# Altium PCB PCB1.PcbDoc
Units mm, origin at the board's own origin, x right, y up, seen from the top; angles counter-clockwise.
Board outline 123.82 x 94.36 mm, 2 copper layers (Top Layer, Bottom Layer); 60 components, 37 nets, 199 pads, 35 vias.
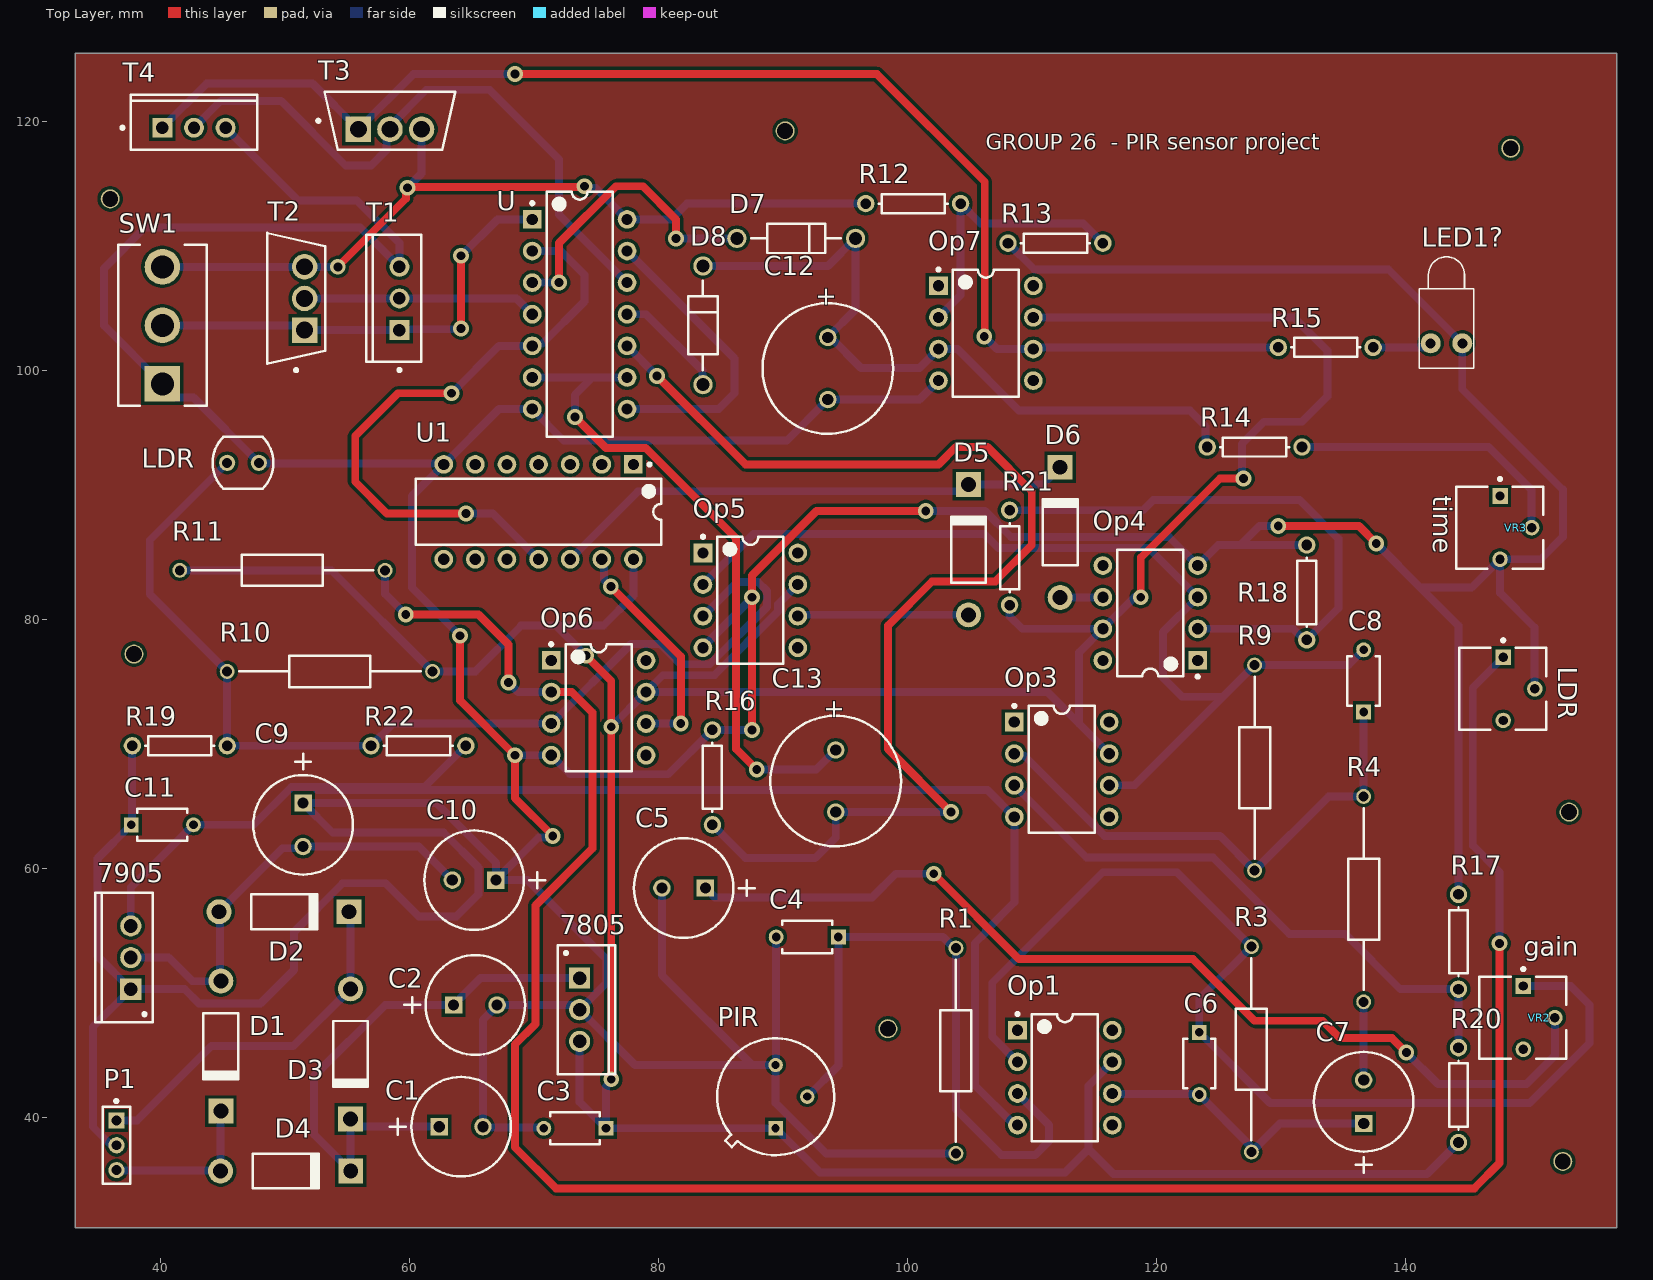
[diagram p0: Top Layer view]
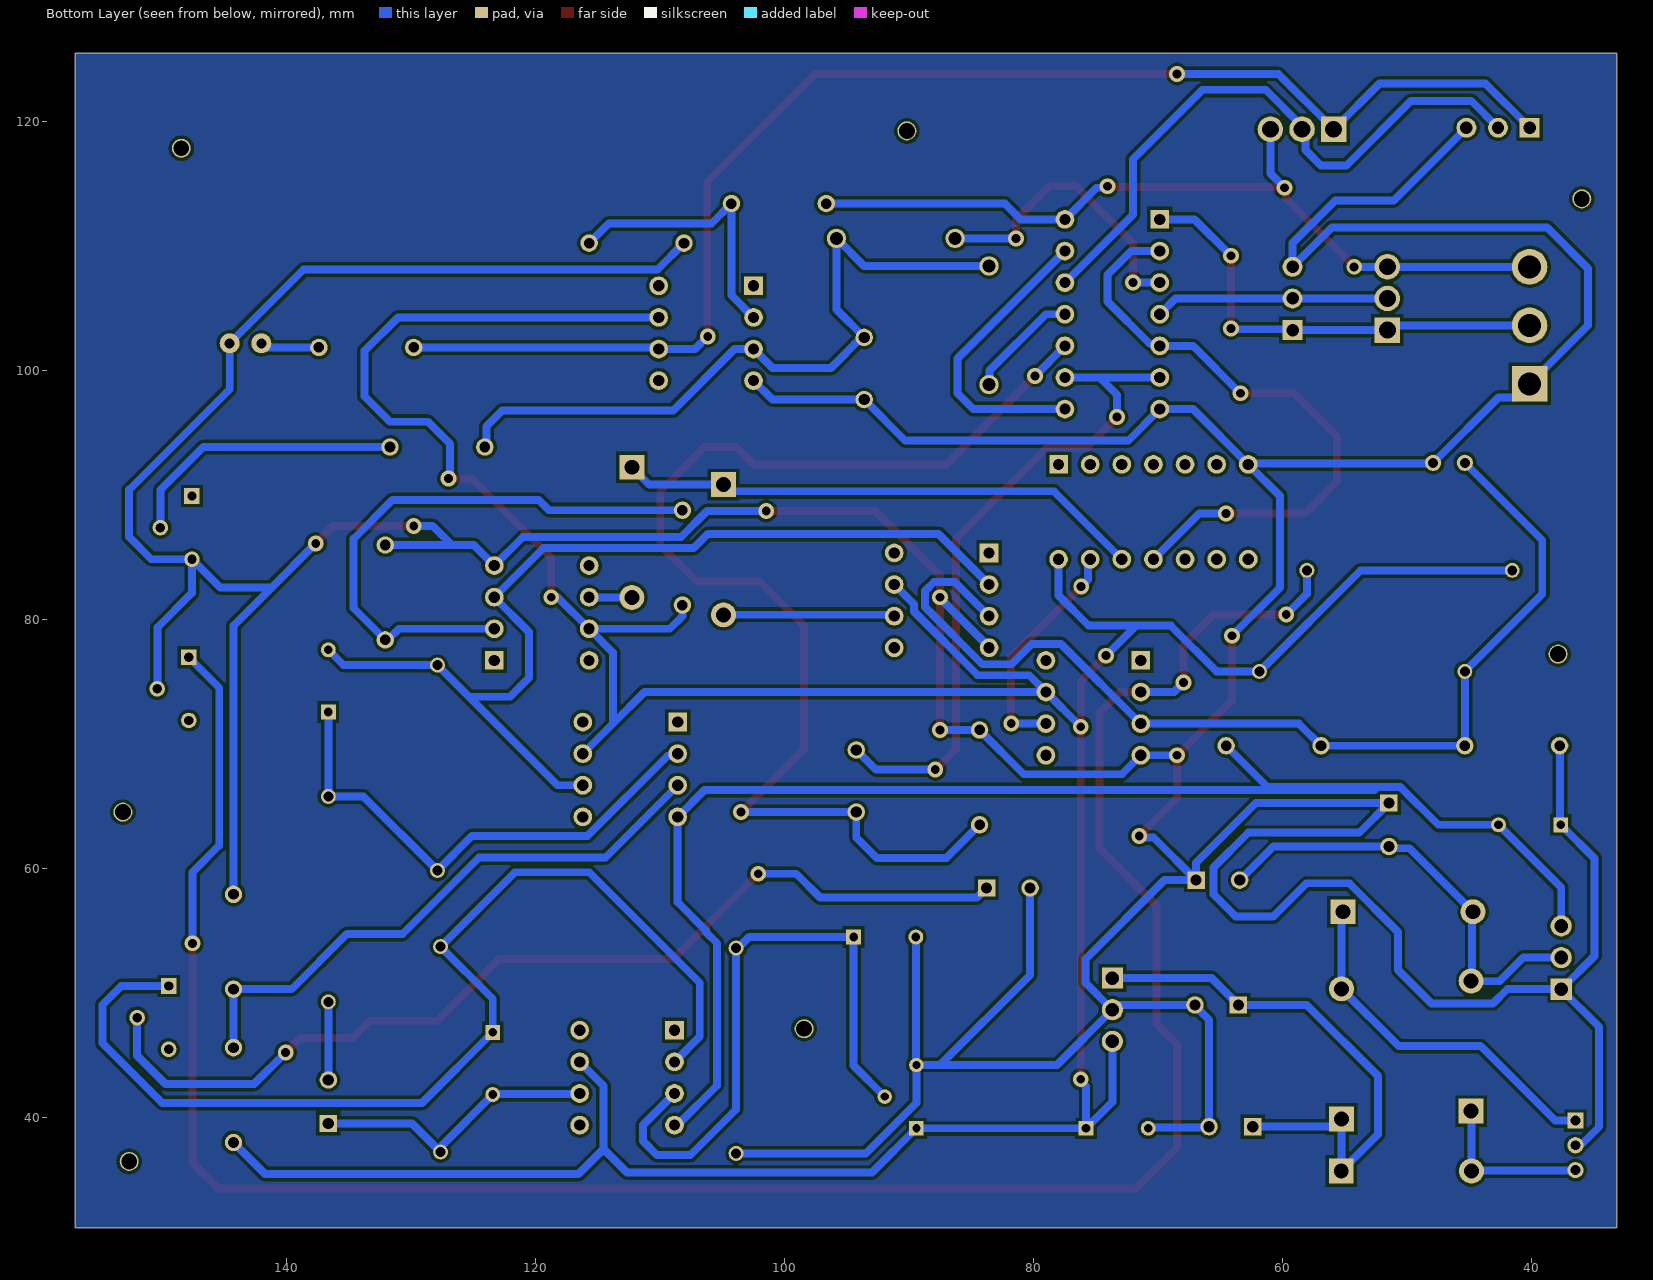
[diagram p1: Bottom Layer view, seen from below]

## Layer stack, top to bottom
Top Solder: solder mask 0.0102, Solder Resist, Dk 3.5
Top Layer: signal copper 0.0356
Dielectric 1: dielectric 0.32, FR-4, Dk 4.8
Bottom Layer: signal copper 0.0356
Bottom Solder: solder mask 0.0102, Solder Resist, Dk 3.5

## Board outline
33.147,31.115 156.972,31.115 156.972,125.476 33.147,125.476

## Design rules (kind name [scope] priority, off if disabled: settings)
Clearance [All] p1: gap=0.254 ignorepadtopadclearanceinfootprint=TRUE except(0: Arc-Hole Track-Hole SMDPad-Hole THPad-Hole Via-Hole Fill-Hole Poly-Hole Region-Hole Text-Hole)
PolygonConnect [All] p1: connectstyle=Relief reliefconductorwidth=0.254 reliefentries=4 polygonreliefangle="90 Angle" airgapwidth=0.254
RoutingVias [All] p1: holewidth=0.711 width=1.27 viastyle="Through Hole" minholewidth=0.711 minwidth=1.27 maxholewidth=0.711 maxwidth=1.27
SolderMaskExpansion [All] p1: expansion=0.102 istentingtop=FALSE
Width [All] p1: maxlimit=0.635 minlimit=0.254 preferedwidth=0.635 minimp=50.000000 maximp=50.000000 favimp=50.000000
30 further rules are at their usual default settings.

## Components (designator, comment, footprint, x,y, rotation, side; value= is the part's Value field where it differs from the comment)
7805 "L7805CV" TO220 73.66,48.641 r270 top
7905 "L7905CV" TO-220 37.592,52.832 r90 top
C1 "470uF 16V" CAPPR65-350-1150X800X1250 64.135,39.243 r0 top
C2 "330nF 16V" CAPPR65-350-1150X800X1250 65.278,49.022 r0 top
C3 "100nF" FP-K15H5-MFG 73.279,39.116 r180 top
C4 "100nF" FP-K15H5-MFG 91.948,54.483 r180 top
C5 "47uF 16V" CAPPR65-350-1150X800X1250 82.014,58.42 r180 top
C6 "10nF" FP-K15H5-MFG 123.444,44.323 r270 top
C7 "10uF 16V" CAPPR65-350-1150X800X1250 136.652,41.247 r90 top
C8 "10nF" FP-K15H5-MFG 136.652,75.057 r90 top
C9 "470uF 16V" CAPPR65-350-1150X800X1250 51.435,63.5 r270 top
C10 "330nF 16V" CAPPR65-350-1150X800X1250 65.179,59.055 r180 top
C11 "100nF" FP-K15H5-MFG 40.132,63.5 r0 top
C12 "ECA-1HHG471" PNSC-CAP-10x20-P2 93.599,100.163 r270 top
C13 "ECA-1HHG471" PNSC-CAP-10x20-P2 94.234,67.016 r270 top
D1 "Diode 1N4004" DO-41 44.831,45.72 r270 top
D2 "Diode 1N4004" DO-41 49.911,56.515 r0 top
D3 "Diode 1N4004" DO-41 55.245,45.085 r270 top
D4 "Diode 1N4004" DO-41 50.038,35.687 r0 top
D5 "Diode 1N4004" DO-41 104.902,85.598 r90 top
D6 "Diode 1N4004" DO-41 112.268,86.995 r90 top
D7 "1N4004" ONSC-AXIAL_LEAD-2-59-10_P 91.059,110.617 r180 top
D8 "1N4004" ONSC-AXIAL_LEAD-2-59-10_P 83.566,103.632 r270 top
LDR "3362P-1-103LF" BOUR-3362P 147.828,74.422 r270 top (schematic designator VR1)
LDR "VT90N1" EXCE-VT90N1 46.609,92.583 r180 top
LED1? "LED1" LED-1 143.307,102.186 r90 top
Op1 "LM741" P0008A 112.649,43.18 r0 top
Op3 "LM741" P0008A 112.395,67.945 r0 top
Op4 "LM741" P0008A 119.507,80.518 r180 top
Op5 "LM741" P0008A 87.376,81.534 r0 top
Op6 "LM741" P0008A 75.184,72.898 r0 top
Op7 "LM741" P0008A 106.299,102.997 r0 top
P1 "951103-8622-AR" FP-951103-8622-AR-MFG 36.449,37.751 r270 top
PIR "IRA-S210ST01" FP-IRA-S210ST01-MFG 89.408,41.656 r180 top
R1 "47kΩ" RESAD1650W60L650D250 103.886,53.594 r270 top
R3 "2MΩ" RESAD1650W60L650D250 127.635,53.711 r270 top
R4 "10kΩ" RESAD1650W60L650D250 136.652,49.276 r90 top
R9 "1MΩ" RESAD1650W60L650D250 127.889,59.827 r90 top
R10 "10kΩ" RESAD1650W60L650D250 45.339,75.819 r0 top
R11 "5kΩ" RESAD1650W60L650D250 58.029,83.947 r180 top
R12 "47kΩ" AXIAL-0.3 100.457,113.411 r0 top
R13 "47kΩ" AXIAL-0.3 111.887,110.236 r180 top
R14 "Res1" AXIAL-0.3 127.889,93.853 r180 top value=1K
R15 "Res1" AXIAL-0.3 133.604,101.854 r0 top value=1K
R16 "Res1" AXIAL-0.3 84.328,67.31 r90 top value=1K
R17 "47kΩ" AXIAL-0.3 144.272,54.102 r270 top
R18 "47kΩ" AXIAL-0.3 132.08,82.169 r270 top
R19 "47kΩ" AXIAL-0.3 41.529,69.85 r0 top
R20 "47kΩ" AXIAL-0.3 144.272,41.783 r270 top
R21 "47kΩ" AXIAL-0.3 108.204,84.963 r270 top
R22 "47kΩ" AXIAL-0.3 60.706,69.85 r0 top
SW1 "A101SYCB04" FP-A101SYCB04-MFG 40.132,103.632 r180 top
T1 "SPP21N50C3" INF-PG-TO220-3-1 59.182,105.791 r180 top
T2 "IRF9530PBF" FP-X15-0364-MFG 50.877,105.791 r180 top
T3 "IRF9530PBF" FP-X15-0364-MFG 58.42,120.065 r90 top
T4 "SPP21N50C3" INF-PG-TO220-3-1 42.672,119.507 r90 top
U "SN74AHCT08N" N0014A 73.66,104.521 r0 top
U1 "SN74AHCT08N" N0014A 70.358,88.646 r270 top
VR2 "3362P-1-103LF" BOUR-3362P 149.444,48.006 r270 top
VR3 "3362P-1-103LF" BOUR-3362P 147.574,87.376 r270 top

## Footprints (in the part's own frame and the unit in brackets; to place one, negate y for a bottom-side part, rotate by r counter-clockwise, add the part's x,y. Pads: shape width x height; smd on the part's side, far side on the other; paste and mask are expansions set on the pad)
AXIAL-0.3 [mm] "Axial Device, Thru-Hole; 2 Leads; 0.3 in Pin Spacing"
  round 1.4 hole 0.85: 1(-3.81,0) 2(3.81,0)
  silkscreen extent -2.77,-0.76 2.77,0.76
BOUR-3362P [mm] "THD, 3-Leads, Body 6.6x6.99mm, Pitch 2.54mm"
  rect 1.25x1.25 hole 0.75: 1(-2.54,0.035)
  round 1.25 hole 0.75: 2(0,2.575) 3(2.54,0.035)
  silkscreen extent -4.02,-3.49 3.3,3.5, body extent -3.3,-3.49 3.3,3.49, height 4.95
CAPPR65-350-1150X800X1250 [mm] "THD, 2-Leads, Dia 8mm, Body 11.5mm"
  rect 1.4x1.4 hole 0.9: 1(-1.75,0)
  round 1.4 hole 0.9: 2(1.75,0)
  silkscreen extent -5.72,-4 4,4, body extent -4,-4 4,4, height 12.5
DO-41 [mm] "Diode, Axial; Body 5.2 x 2.7 mm (LxDia. max), Lead Dia. 0.86 mm (max)"
  round 2 hole 1.2: 1(-5.23,0)
  rect 2x2 hole 1.2: 2(5.23,0)
  silkscreen extent -2.65,-1.4 2.75,1.4
EXCE-VT90N1 [mm] "THD, 2-Leads, Body Width 4.17mm (Max), Height 2.29mm"
  round 1.3 hole 0.8: 1(-1.27,0) 2(1.27,0)
  silkscreen extent -2.44,-2.08 2.44,2.08, body extent -2.44,-2.09 2.44,2.09, height 2.29
FP-951103-8622-AR-MFG [mm]
  rect 1.3x1.3 hole 0.8 paste-1000 mask+0: 1(-2,0)
  round 1.3 hole 0.8 paste-1000 mask+0: 2(0,0) 3(2,0)
  silkscreen extent -3.67,-1.1 3.1,1.1, body extent -3.2,-1.2 3.2,1.2, height 0.25
FP-A101SYCB04-MFG [mil]
  rect 112.37x112.37 hole 73 paste-39370.1 mask+0: 1(0,185)
  round 112.37 hole 73 paste-39370.1 mask+0: 2(0,0) 3(0,-185)
  silkscreen extent -140,-255 140,255, body extent -144,-259 144,259, height 10
FP-IRA-S210ST01-MFG [mm]
  rect 1.15x1.15 hole 0.65 paste-1000 mask+0: 1(0,2.54)
  round 1.15 hole 0.65 paste-1000 mask+0: 2(-2.54,0) 3(0,-2.54)
  silkscreen extent -4.7,-4.7 4.7,4.7, body extent -4.8,-4.8 4.8,4.8, height 0.25
FP-K15H5-MFG [mm]
  rect 1.2x1.2 hole 0.7 paste-1000 mask+0: 1(-2.5,0)
  round 1.2 hole 0.7 paste-1000 mask+0: 2(2.5,0)
  silkscreen extent -2,-1.3 2,1.3, body extent -3.2,-1.4 3.2,1.4, height 0.25
FP-X15-0364-MFG [mm]
  rect 2.05x2.05 hole 1.35 paste-1000 mask+0: 1(-0.685,2.54)
  round 2.05 hole 1.35 paste-1000 mask+0: 2(-0.685,0) 3(-0.685,-2.54)
  silkscreen extent -2.33,-5.26 2.33,5.88, body extent -2.42,-5.36 2.42,5.36, height 0.25
INF-PG-TO220-3-1 [mm] "FM, 3-Leads, Body 10x4.4mm, Pitch 2.54mm"
  rect 1.6x1.6 hole 1: 1(0,2.54)
  round 1.6 hole 1: 2(0,0) 3(0,-2.54)
  silkscreen extent -1.75,-5.1 2.65,5.87, body extent -1.75,-5.1 2.65,5.1, height 20.7
LED-1 [mm] "LED; 2 Leads"
  round 1.6 hole 0.8: 1(0,1.27) 2(0,-1.27)
  silkscreen extent -2,-2.2 6.95,2.2
N0014A [mm] "DIP, 14-Leads, Body 19.7x6.6mm, Pitch 2.54mm"
  rect 1.5x1.5 hole 0.9: 1(-3.81,7.62)
  round 1.5 hole 0.9: 2(-3.81,5.08) 3(-3.81,2.54) 4(-3.81,0) 5(-3.81,-2.54) 6(-3.81,-5.08) 7(-3.81,-7.62) 8(3.81,-7.62) 9(3.81,-5.08) 10(3.81,-2.54) 11(3.81,0) 12(3.81,2.54) 13(3.81,5.08) 14(3.81,7.62)
  silkscreen extent -3.93,-9.85 2.65,9.85, body extent -3.95,-9.85 3.95,9.85, height 5.08
ONSC-AXIAL_LEAD-2-59-10_P [mm] "AXIAL, 2-Leads, Diameter 2.35mm"
  round 1.55 hole 1.05: 1(-4.77,0) 2(4.77,0)
  silkscreen extent -3.6,-1.18 3.6,1.18
P0008A [mm] "DIP, 8-Leads, Body 10.15x6.6mm, Pitch 2.54mm"
  rect 1.5x1.5 hole 0.9: 1(-3.81,3.81)
  round 1.5 hole 0.9: 2(-3.81,1.27) 3(-3.81,-1.27) 4(-3.81,-3.81) 5(3.81,-3.81) 6(3.81,-1.27) 7(3.81,1.27) 8(3.81,3.81)
  silkscreen extent -3.93,-5.1 2.65,5.23, body extent -3.95,-5.07 3.95,5.07, height 5.08
PNSC-CAP-10x20-P2 [mm] "THD, 2-Leads, Dia 10.5mm, Body Length 22mm, Pin Spacing 5mm"
  round 1.4 hole 0.9: 1(-2.5,0) 2(2.5,0)
  silkscreen extent -5.25,-5.25 5.25,5.25, body extent -5.25,-5.25 5.25,5.25, height 22
RESAD1650W60L650D250 [mm]
  round 1.2 hole 0.8: 1(0,0) 2(16.5,0)
  silkscreen extent 0.95,-1.25 15.55,1.25, body extent -0.3,-1.25 16.8,1.25, height 2.49
TO220 [mm] "TO, Thru-Hole, Vertical, Heatsink Mounted; 3 In-Line Leads; Pitch 2.54 mm"
  rect 1.7x1.7 hole 1.1: 1(-2.54,0)
  round 1.7 hole 1.1: 2(0,0) 3(2.54,0)
  silkscreen extent -5.2,-1.75 5.2,2.85, body extent -5.25,-1.8 5.25,2.9, height 19.7
TO-220 [mm] "TO, Thru-Hole, Vertical, Heatsink Mounted; 3 In-Line Leads; Pitch 2.54 mm"
  rect 1.7x1.7 hole 1.1: 1(-2.54,0)
  round 1.7 hole 1.1: 2(0,0) 3(2.54,0)
  silkscreen extent -5.2,-1.75 5.2,2.85, body extent -5.25,-1.8 5.25,2.9, height 19.7

## Part data
7805: library part CMP-0244-00483-1, "Positive Voltage Regulator, 5V, 3-Pin TO-220", ComponentLink1Description="Manufacturer URL", ComponentLink1URL=http://www.st.com, ComponentLink2Description=Datasheet, ComponentLink2URL=http://www.st.com/internet/com/TECHNICAL_RESOURCES/TECHNICAL_LITERATURE/DATASHEET/CD00000444.pdf, ComponentLink3Description="Package Specification", ComponentLink3URL=http://www.st.com/internet/com/TECHNICAL_RESOURCES/TECHNICAL_LITERATURE/PACKAGE_INFORMATION/CD00004649.pdf, DatasheetVersion=16/11/2011, PackageDescription="TO, Thru-Hole, Vertical, Heatsink Mounted; 3 In-Line Leads; Pitch 2.54 mm", PackageReference=TO220, PackageVersion=ver3.0
7905: library part CMP-0244-00447-1, "Negative Voltage Regulator, -5V, 3-Pin TO-220", ComponentLink1Description="Manufacturer URL", ComponentLink1URL=http://www.st.com, ComponentLink2Description=Datasheet, ComponentLink2URL=http://www.st.com/internet/com/TECHNICAL_RESOURCES/TECHNICAL_LITERATURE/DATASHEET/CD00000450.pdf, DatasheetVersion=1/11/2011, PackageDescription="TO, Thru-Hole, Vertical, Heatsink Mounted; 3 In-Line Leads; Pitch 2.54 mm", PackageReference=TO-220, PackageVersion=2011
C1 C2 C5 C7 C9 C10: library part CMP-1665-00042-2, "Aluminum Electrolytic Capacitor, 100 uF, +/- 20%, 50 V, -40 to 85 degC, 2-Pin THD, RoHS, Bulk", Capacitance=100uF, Case/Package=Radial, Dielectric Material=Aluminium, Leakage Current=3uA, Manufacturer=Panasonic, Max Operating Temperature=85degC, Min Operating Temperature=-40degC, Package Description="2-Pin Radial Lead, Dia 8 mm, Height 12.5 mm", Package Quantity=200, Package Reference=CAPPR65-350-1150X800X1250, Ripple Current=250mA, Tolerance=20%, Voltage=50V, Datasheet URL=https://industrial.panasonic.com/cdbs/www-data/pdf/RDF0000/ABA0000C1218.pdf, Datasheet Version="Rev. 05, 10/2016", Diameter=8mm, Dissipation Factor=0.12%, Height=11.5mm, Height - Seated (Max)=0.492inch, Lead Diameter=0.6mm, Lead Free=LeadFree, Lead Pitch=3.5mm, Lead/Base Style=Straight, Length=11.5mm, Life (Hours)=2000Hour, Manufacturer URL=http://www.panasonic.com/, Mount=ThroughHole, Number of Pins=2, Packaging=Bulk, Polarity=Polar, Radiation Hardening=No, REACH SVHC=NoSVHC, Ripple Current (AC)=250mA, RoHSCompliant=true, Termination=Radial, Voltage Rating=50V, Voltage Rating (DC)=50V
C3 C4 C11: library part CMP-02417-000048-1, "CAP CER 0.1UF 50V X7R RADIAL", Case/Package=Dipped, Dielectric=X7R, Max Operating Temperature=125°C, Min Operating Temperature=-55°C, Package Quantity=5000, Tolerance=10%, Voltage=50V, Capacitance=100nF, Construction=RADIAL, Depth=2.5mm, Diameter=500um, Height=4mm, Height - Seated (Max)=0.1inch, Lead Diameter=0.5mm, Lead Length=30mm, Lead Pitch=5mm, Lead/Base Style="Formed Leads", Length=4mm, Mount="Through Hole", Packaging=Bulk, Radiation Hardening=No, RoHS Compliant=Yes, Series=K, Termination=Radial, Thickness=2.6mm, Voltage Rating=50V, Voltage Rating (DC)=50V, Weight=0.005644oz, Width=2.5mm
C6 C8: library part CMP-02417-000048-1, "CAP CER 0.1UF 50V X7R RADIAL", Capacitance=100nF, Case/Package=Dipped, Dielectric=X7R, Max Operating Temperature=125°C, Min Operating Temperature=-55°C, Package Quantity=5000, Tolerance=10%, Voltage=50V, Construction=RADIAL, Depth=2.5mm, Diameter=500um, Height=4mm, Height - Seated (Max)=0.1inch, Lead Diameter=0.5mm, Lead Length=30mm, Lead Pitch=5mm, Lead/Base Style="Formed Leads", Length=4mm, Mount="Through Hole", Packaging=Bulk, Radiation Hardening=No, RoHS Compliant=Yes, Series=K, Termination=Radial, Thickness=2.6mm, Voltage Rating=50V, Voltage Rating (DC)=50V, Weight=0.005644oz, Width=2.5mm
C12 C13: library part CMP-2000-05308-1, "Aluminum Electrolytic Capacitor, 470 uF, +/- 20%, 50 V, -55 to 105 degC, 2-Pin THD, RoHS, Bulk", Capacitance=470µF, Case Size/Dimension=Ø10x20mm, Lifetime@Temperature=2000Hrs@105degC, Manufacturer=Panasonic, Operating Temp Range=-55to+105degC, Operating Temp-Max=105degC, Package Description="2-Pin Through Hole Device, Dia 10 mm, Body Length 20 mm, Pin Spacing 5 mm", Package Reference=CAP-10x20-P2, Package Version=Nov-12, Rated Voltage=50V, Ripple Current=530mA, Datasheet URL=http://www.alliedelec.com/images/products/datasheets/bm/Panasonic/70067776.pdf, Datasheet Version=Nov-12, Manufacturer URL=http://www.panasonic.com/, Package URL=http://www.alliedelec.com/images/products/datasheets/bm/Panasonic/70067776.pdf, Series=NHG, Type=Radial
D1 D2 D3 D4 D5 D6: "1 Amp General Purpose Rectifier", Code_JEDEC=DO-204-AL, ComponentLink1Description="Manufacturer Link", ComponentLink1URL=http://www.fairchildsemi.com/, ComponentLink2Description=Datasheet, ComponentLink2URL=http://www.fairchildsemi.com/ds/1N%2F1N4001.pdf, DatasheetVersion=1998, LatestRevisionDate=17-Jul-2002, LatestRevisionNote="Re-released for DXP Platform.", PackageDescription="Diode, Axial; Body 5.2 x 2.7 mm (LxDia. max), Lead Dia. 0.86 mm (max)", PackageReference=DO-41, PackageVersion=Aug-1999, Published=8-Jun-2000, Publisher="Altium Limited"
D7 D8: library part CMP-0902-00115-1, "Standard Recovery Rectifier, 2-Pin Axial_Lead, Pb-Free, Bulk Bag", Manufacturer="On Semiconductor", ComponentLink1Description="Manufacturer URL", ComponentLink1URL=http://www.onsemi.com/, ComponentLink2Description=Datasheet, ComponentLink2URL=http://www.onsemi.com/pub_link/Collateral/1N4001-D.PDF, ComponentLink3Description="Package Specification", ComponentLink3URL=http://www.onsemi.cn/pub_link/Collateral/59-10.PDF, DatasheetVersion="Rev. 13", IFSM Max (A)=30, IO(rec) Max (A)=1, Mounting Technology="Through Hole", PackageDescription="2-Pin, Axial Lead, Diameter 2.35 mm", PackageReference=AXIAL_LEAD-2-59-10, PackageVersion="Rev. U, 02/2005", Packing="Bulk Bag", PartNumber=1N4004, RoHS=TRUE, Type="Standard Recovery", VRRM Max (V)=400
LDR VR2 VR3: library part CMP-1747-00004-1, "Square Trimpot(R) Trimming Potentiometer, 10 KOhm, 300 V, -55 to 125 degC, 3-Pin THD, RoHS, Tube", Case Code (Imperial)=0612, Case Code (Metric)=1632, Case/Package=1206, Max Operating Temperature=125degC, Min Operating Temperature=-25degC, Package Quantity=5000, Power Rating="1 W", Resistance="50 mohm", Tolerance=1%, Voltage Rating="220 mV", ComponentLink1Description="Manufacturer URL", ComponentLink1URL=http://www.bourns.com/, ComponentLink2Description=Datasheet, ComponentLink2URL=http://www.bourns.com/docs/Product-Datasheets/3362.pdf, DatasheetVersion=May-16, Height="0.6 mm", Length="3.2 mm", Mount="Surface Mount", PackageDescription="3-Pin Through Hole Device, Body 6.6 x 6.99 mm, Pitch 2.54 mm", PackageReference=3326P, Packaging="Tape and Reel", Pins=2, REACH SVHC="No SVHC", RoHSCompliant=True, Width="1.6 mm"
LDR: library part CMP-2000-07406-1, "Photoconductive Resistor, 200 kOhm, 100 V, 80 mW, -40 to 75 degC, 2-Pin THD, RoHS", Dark Resistance=200kohm, Manufacturer="Excelitas Technology", Operating Temperature Max=75°C, Operating Temperature Min=-40°C, Package Description="2-Pin Through Hole Device, Body Width 4.17 mm (Max), Height 2.29 mm", Power Rating=80mW, Resistance @ Lux=12kohm, Resistor Case Style=-, Voltage Rating=100V, Datasheet URL=http://datasheet.octopart.com/VT90N1-Excelitas-datasheet-10388451.pdf, Datasheet Version=09/2006, Manufacturer URL=http://www.excelitas.com/Pages/Index.aspx, Mounting Technology=ThroughHole, Package Reference=VT90N1, Packaging=Each, Product Range=-, SVHC=Cadmiumchloride(15-Jun-2015)
LED1?: "Typical RED GaAs LED", LatestRevisionDate=08-Jul-2005, LatestRevisionNote="Mech Layer 1 removed.", PackageDescription="LED; 2 Leads", PackageReference=LED-1, Published=8-Jun-2000, Publisher="Altium Limited"
Op1 Op3 Op4 Op5 Op6 Op7: library part CMP-0055-00162-3, "Operational Amplifier, 8-pin MDIP, Pb-Free", Manufacturer="Texas Instruments", Package Reference=P0008A, PackageTopMarking=NSUZXYTTE#*LM*741CN, PowerWise=N, Code_JEDEC=MS-001-BA, ComponentLink1Description="Datasheet URL", ComponentLink1URL=http://www.ti.com/general/docs/lit/getliterature.tsp?genericPartNumber=LM741&fileType=pdf, CompType=Amplifiers, PackageDescription="MDIP, .365 x .250 x .130in, 8 Lead, .100in Pitch", PinCount=8, RoHS=Y
P1: library part CMP-05379-000003-1, "CONN HEADER VERT 3POS 2MM", Current Rating=2A, Manufacturer=3M, Temperature="-55°C to +125°C", Temperature Range High=+125°C, Temperature Range Low=-55°C, Automotive=No, Category=Conn, ComponentLink2Description=Datasheet, ComponentLink2URL=http://multimedia.3m.com/mws/media/1400506O/3m-pin-strip-header-951-series-78-5100-2653-3.pdf, Conn Gender=Male, Conn Orientation=Straight, Contact Material=Gold,Nickel, Device Class L1=Connectors, Device Class L2="Headers and Wire Housings", Device Class L3=unset, Digikey Description="CONN HEADER VERT 3POS 2MM", Height=6.3mm, Lead Free=Yes, Manufacturer Part Number=951103-8622-AR, Mouser Description="Header; PinStrip; CopperAlloy; HighTempThermoplastic; 3Cnts; 1A; RtAngle; 951Series", Number Of Contacts=3, Number Of Rows=1, Octopart=https://octopart.com/951103-8622-ar-3m-14400669, Package=951103-8622-AR, Pitch=2mm, RoHS=TRUE
PIR: library part CMP-06150-000001-1, "MOTION SENSOR", Manufacturer=Murata, Max Supply Voltage=15V, Min Supply Voltage=2V, Temperature="-40°C to +70°C", Temperature Range High=+70°C, Temperature Range Low=-40°C, Automotive=No, Category=IC, ComponentLink2Description=Datasheet, ComponentLink2URL=https://www.murata.com/en-us/api/pdfdownloadapi?cate=luInfraredSensors&partno=IRA-S210ST01, Device Class L1=Sensors, Device Class L2="Optical Sensors", Device Class L3="Photoelectric Sensors", Digikey Description="MOTION SENSOR", Height=4.9mm, Lead Free=Yes, Manufacturer Part Number=IRA-S210ST01, Octopart=https://octopart.com/ira-s210st01-murata-30987376, Package=IRA-S210ST01, RoHS=TRUE
R1 R3 R4 R9 R10 R11 R12 R13 R17 R18 R19 R20 R21 R22: library part MRS25000C1002FC100, "Resistor", Manufacturer_Name=Vishay, Mouser Part Number=594-2322-156-11003, Arrow Part Number=MRS25000C1002FC100, Arrow Price/Stock=https://www.arrow.com/en/products/mrs25000c1002fc100/vishay, Datasheet Link=http://www.vishay.com/docs/28724/mrs16m25.pdf, Manufacturer_Part_Number=MRS25000C1002FC100, Mouser Price/Stock=https://www.mouser.co.uk/ProductDetail/Vishay-BC-Components/MRS25000C1002FC100?qs=B52Dqq1Chl6h6M7hjffcZQ%3D%3D
R14 R15 R16: "Resistor", LatestRevisionDate=17-Jul-2002, LatestRevisionNote="Re-released for DXP Platform.", PackageDescription="Axial Device, Thru-Hole; 2 Leads; 0.3 in Pin Spacing", PackageReference=AXIAL-0.3, Published=8-Jun-2000, Publisher="Altium Limited"
SW1: library part CMP-03408-000017-1, "SWITCH TOGGLE SPDT 0.4VA 20V", Actuator Color=Chrome, Contact Current Rating=400mA, Contact Resistance=10mR, Flammability Rating="UL94 V-1", Insulation Resistance=30MR, Max Operating Temperature=85°C, Max Voltage Rating (AC)=20V, Min Operating Temperature=-30°C, Package Quantity=100, Power Rating=400mW, Actuator Length=10.41mm, Actuator Material=Phenolic, Actuator Type="Standard Round", Contact Material=Copper, Contact Plating=Gold, Depth=6.86mm, Electrical Life=6000Cycles, ELV=Compliant, Illumination Type=Non-Illuminated, Lead Free="Lead Free", Max Voltage Rating (DC)=20V, Mount=Panel, Number of Poles=1, Number of Positions=2, Orientation=Straight, Packaging=Bulk, Radiation Hardening=No, REACH SVHC="No SVHC", RoHS Compliant=Yes, Series="Gemini A", Switch Function=On-On, Termination="PC Pins", Throw Configuration=SPDT, Voltage Rating (AC)=20V, Voltage Rating (DC)=20V
T1 T4: library part CMP-1164-00015-1, "N-Channel CoolMOS Power-Transistor, 500 V VDS, 21 A ID, -55 to 150 degC, PG-TO220-3-1, Tube, Green", Manufacturer=Infineon, ComponentLink1Description="Manufacturer URL", ComponentLink1URL=http://www.infineon.com/, ComponentLink2Description=Datasheet, ComponentLink2URL=http://www.infineon.com/dgdl/SPP_I_A21N50C3_Rev%5B1%5D.3.2%2Bnew.pdf?folderId=db3a304412b407950112b408e8c90004&fileId=db3a304412b407950112b42cf25f47d8, ComponentLink3Description="Package Specification", ComponentLink3URL=http://www.infineon.com/dgdl/BTS117_DS_14.pdf?folderId=db3a30431400ef68011421b54e2e0564&fileId=db3a30433a747525013abff8302d549c&location=en.Products.Automotive_ICs.Smart_High-_and_Low-Side_Switches.HITFET___TEMPFET__-_Smart_Low-Side_Switches.DATASHEET.BTS1, DatasheetVersion="Rev. 3.2", Green=TRUE, ID (max)="21Â A", IDpuls (max)="63Â A", Mounting Technology="Through Hole", PackageDescription="3-Pin Plastic (Green) Transistor Single Outline Package, 10 x 9.25 mm Body, 2.54 mm Pitch", PackageReference=PG-TO220-3-1, PackageVersion=Jul-12, Packing=Tube, PartNumber=SPP21N50C3, Polarity=N, Ptot (max)="208Â W", QG="95Â nC", RDS (on) (max)="190Â mOhm", Rth="0.6Â K/W", RthJA (max)="62Â K/W", RthJC (max)="0.6Â K/W", Technology="CoolMOS C3", VDS (max)="500Â V", VGS(th) (max)="3.9Â V", VGS(th) (min)="2.1Â V"
T2 T3: library part CMP-02550-000233-1, "MOSFET P-CH 100V 12A TO-220AB", Case/Package=TO-220AB, Continuous Drain Current (ID)=12A, Current Rating=-12A, Drain to Source Breakdown Voltage=-100V, Drain to Source Resistance=300mR, Drain to Source Voltage (Vdss)=100V, Gate to Source Voltage (Vgs)=20V, Input Capacitance=860pF, Max Operating Temperature=175°C, Max Power Dissipation=88W, Min Operating Temperature=-55°C, Package Quantity=50, Threshold Voltage=-4V, Drain-source On Resistance-Max=300mR, Element Configuration=Single, Fall Time=39ns, Height=9.01mm, Lead Free="Lead Free", Length=10.41mm, Mount="Through Hole", Number of Channels=1, Number of Elements=1, Number of Pins=3, On-State Resistance=300mR, Packaging=Rail/Tube, Polarity=P-CHANNEL, Polarization=P, Power Dissipation=88W, Radiation Hardening=No, Rds On Max=300mR, Recovery Time=240ns, Rise Time=52ns, RoHS Compliant=Yes, Series=-, Turn-Off Delay Time=31ns, Turn-On Delay Time=12ns, Voltage Rating (DC)=-100V, Weight=0.211644oz, Width=4.7mm
U U1: library part CMP-0777-00278-3, "Quadruple 2-Input Positive-AND Gates, N0014A, TUBE", F @ Nom Voltage(Max)(Mhz)=70, Generic Part Number=SN74AHCT08, ICC @ Nom Voltage(Max)(mA)=0.02, Manufacturer="Texas Instruments", Operating Temperature Range(C)="-40 to 125,-40 to 85", Rating=Catalog, tpd @ Nom Voltage(Max)(ns)=8, Voltage(Nom)(V)=5, Bits(#)=4, DatasheetVersion=SCLS237M, Input Type=TTL, Output Drive (IOL/IOH)(Max)(mA)=-8/8, Output Type=CMOS, PackageReference=N0014A, Schmitt Trigger=No, Technology Family=AHCT, VCC(Max)(V)=5.5, VCC(Min)(V)=4.5

## Free pads (board coordinates)
  round 1.524 hole 1.27: 2(148.463,117.856) 3(35.941,113.792) 4(37.846,77.216) 6(98.425,47.117) 7(90.17,119.253) 8(152.654,36.449) 9(153.162,64.516)

## Via types
v1: diameter 1.27, hole 0.711, Top Layer to Bottom Layer, 35 vias

## Nets (pads, with @x,y where several pads share a name; then routed paths per layer and width w, separated by ;. In a path a pad name is that pad's centre, name@x,y a point inside that pad or via, vN(x,y) a via of type N, cw(c..) or ccw(c..) an arc to the next point about the centre after c; other vN are vias at no path point)
+5: 7805.3 C3.1 Op1.7 Op3.7 Op4.7 Op5.7 Op6.7 Op7.7 PIR.1 R10.2 R11.2 R20.2 R21.2 U1.14 | length 310
  Top Layer w0.635: v1(74.168,77.089) 76.2,75.057 v1(76.2,43.053) ; v1(118.745,81.788) 118.745,84.963 125.095,91.313 v1(127,91.313)
  Bottom Layer w0.635: R11.2 53.711,83.947 R10.2 65.278,75.819 68.961,79.502 71.755,79.502 ; 7805.3 73.66,41.235 C3.1 ; v1(74.168,77.089) 71.755,79.502 ; v1(76.2,43.053) 76.2,42.881 75.779,42.46 C3.1 ; v1(76.2,71.374) Op6.7 ; U1.14 77.978,81.915 75.565,79.502 71.755,79.502 ; Op5.7 89.599,81.216 89.599,80.63 84.482,75.513 80.339,75.513 Op6.7 ; R21.2 108.204,80.264 109.22,79.248 Op4.7 ; Op7.7 131.064,104.267 133.731,101.6 133.731,97.917 131.699,95.885 128.651,95.885 126.873,94.107 v1@126.873,91.567 ; Op3.7 113.792,71.628 ; Op1.7 114.535,42.526 114.535,37.446 ; v1(118.745,81.788) 118.237,81.788 Op4.7 ; R20.2 141.732,35.433 116.547,35.433 114.535,37.446 ; C3.1 PIR.1 92.964,35.56 112.649,35.56 114.535,37.446 ; Op6.7 111.252,74.168 113.792,71.628 ; 113.792,71.628 113.792,77.343 Op4.7
+5v: R12.1 SW1.3 T2.3 T3.3 U.14 | length 66.4
  Top Layer w0.635: v1(54.229,108.331) 59.695,113.797 59.695,114.559 59.88,114.745 73.977,114.745 v1(74.041,114.808)
  Bottom Layer w0.635: SW1.3 T2.3 v1(54.229,108.331) ; v1(59.817,114.681) 60.96,115.824 T3.3 ; v1(74.041,114.808) 74.163,114.686 74.925,114.686 U.14 81.026,112.141 82.296,113.411 R12.1
-5: 7905.3 C11.2 Op1.4 Op3.4 R22.2 | length 119.6
  Bottom Layer w0.635: 7905.3 37.592,58.46 C11.2 47.477,63.5 50.498,66.522 52.599,66.522 61.214,66.522 61.214,66.548 R22.2 ; 52.372,66.522 52.599,66.294 106.426,66.294 Op3.4 108.585,57.277 106.299,54.991 106.299,54.864 105.41,53.975 105.41,42.565 108.605,39.37 Op1.4
GND: 7805.2 7905.1 C1.2 C2.2 C3.2 C4.2 C5.2 C9.1 C10.1 C11.1 C12.2 LDR.1@47.879,92.583 LDR.2@150.403,74.422 LED1?.2 Op4.4 Op5.4 Op6.4 Op7.4 P1.2 PIR.3 R1.2 R13.2 R16.2 R17.1 R18.1 R19.1 SW1.1 T1.3 T4.3 U1.7 U.7 VR3.3 | length 596.6
  Top Layer w0.635: v1(64.057,78.691) 64.057,73.484 v1(68.453,69.088) 68.453,65.659 v1(71.501,62.611) ; Op6.4 Op6.4@71.438,69.025 ; v1(87.503,71.12) v1(87.503,81.788) 87.503,83.53 92.684,88.711 101.469,88.711 v1(101.471,88.709) ; v1(129.794,87.503) 136.271,87.503 v1(137.668,86.106)
  Bottom Layer w0.635: P1.2 36.322,37.878 35.909,37.878 34.544,39.243 34.544,47.244 7905.1 ; R19.1 37.675,69.806 37.675,63.544 C11.1 34.925,60.793 34.925,52.959 7905.1 ; T4.3 51.054,113.665 55.753,113.665 59.182,110.236 T1.3 56.007,111.506 38.735,111.506 35.433,108.204 35.433,103.632 SW1.1 41.242,97.823 42.639,97.823 47.879,92.583 47.942,92.519 62.674,92.519 U1.7 ; v1(64.057,78.691) 60.198,82.55 60.198,89.916 U1.7 ; v1(68.453,69.088) Op6.4 72.898,67.564 80.772,67.564 R16.2 v1(87.503,71.12) ; C3.2 70.715,39.179 65.948,39.179 C1.2 65.885,47.828 67.028,48.971 C2.2 72.991,49.022 73.372,48.641 7805.2 ; v1(71.501,62.611) 71.379,62.489 70.363,62.489 C10.1 ; C5.2 80.264,51.435 87.503,44.196 ; Op5.4 83.566,77.787 87.503,81.724 v1(87.503,81.788) ; C4.2 89.428,54.463 89.428,44.216 PIR.3 ; v1(101.471,88.709) 101.473,88.711 106.234,88.711 108.333,86.612 121.033,86.612 Op4.4 124.968,85.979 126.746,85.979 ; Op7.4 100.965,97.663 C12.2 90.297,94.361 72.39,94.361 U.7 67.183,96.901 U1.7 ; R1.2 103.876,37.084 93.472,37.084 89.408,41.148 PIR.3 ; R13.2 110.184,108.129 138.635,108.129 LED1?.2 144.577,98.501 152.654,90.424 152.654,86.614 150.876,84.836 VR3.3 ; v1(129.794,87.503) 128.27,87.503 126.746,85.979 ; R18.1 126.746,85.979 ; v1@137.795,85.979 141.224,82.55 ; R17.1 144.272,79.502 141.224,82.55 ; LDR.2@150.403,74.422 150.368,74.457 150.368,79.375 147.609,82.134 VR3.3 ; 7905.1 41.923,50.292 43.066,49.149 48.015,49.149 50.706,51.84 50.706,54.888 54.619,58.801 58.064,58.801 60.731,56.134 63.754,56.134 65.532,57.912 65.532,60.071 62.738,62.865 53.82,62.865 C9.1 62.131,65.25 66.929,60.452 C10.1 ; C10.1 69.469,59.055 75.819,52.705 75.819,50.8 7805.2 ; 7805.2 78.105,44.196 87.503,44.196 ; 87.503,44.196 PIR.3 ; 141.224,82.55 145.323,82.55 VR3.3
Net7805_1: 7805.1 C1.1 C2.1 D3.2 D4.2 | length 45
  Bottom Layer w0.381: D4.2@55.245,35.71 D4.2
  Bottom Layer w0.635: C1.1 55.857,39.243 D3.2 55.245,35.71 52.324,38.631 52.324,43.307 58.039,49.022 C2.1 65.687,51.181 7805.1
Net7905_2: 7905.2 C9.2 C10.2 D1.1 D2.1 | length 35.7
  Bottom Layer w0.381: D2.1 D2.1@44.756,56.44 ; D1.1@44.756,51.025 D1.1
  Bottom Layer w0.635: 7905.2 40.64,52.832 42.545,50.927 44.808,50.927 D1.1 ; D2.1 49.782,61.616 51.302,61.616 C9.2 60.734,61.75 C10.2 ; D1.1@44.756,51.025 D2.1@44.756,56.44
NetC4_1: C4.1 Op1.3 PIR.2 R1.1 | length 51
  Bottom Layer w0.635: PIR.2@91.928,41.676 PIR.2 94.448,44.156 C4.1 102.844,54.483 103.733,53.594 R1.1 103.886,40.64 107.569,36.957 110.236,36.957 111.379,38.1 111.379,39.37 Op1.3
NetC5_1: C5.1 VR2.2 | length 80.4
  Top Layer w0.635: v1(102.108,59.563) 108.966,52.705 122.936,52.705 127.889,47.752 133.35,47.752 134.747,46.355 138.938,46.355 v1(140.081,45.212)
  Bottom Layer w0.635: C5.1 84.526,57.658 97.155,57.658 99.06,59.563 v1(102.108,59.563) ; v1(140.081,45.212) 142.621,42.672 149.733,42.672 152.019,44.958 VR2.2
NetC6_1: C6.1 Op1.2 R3.1 VR2.1 | length 87.5
  Bottom Layer w0.635: Op1.2 106.807,46.482 106.807,50.8 115.697,59.69 121.656,59.69 R3.1 123.444,49.52 C6.1 129.119,41.148 149.987,41.148 154.813,45.974 154.813,49.022 153.289,50.546 VR2.1
NetC6_2: C6.2 C7.1 Op1.6 R3.2 | length 23.3
  Bottom Layer w0.635: Op1.6 116.503,41.866 123.4,41.866 C6.2 127.527,37.74 127.527,37.319 R3.2 129.921,39.497 C7.1
NetC7_2: C7.2 R4.1 | length 6.3
  Bottom Layer w0.635: C7.2 R4.1
NetC8_1: C8.1 Op3.2 R4.2 R9.1 | length 41.2
  Bottom Layer w0.635: Op3.2 108.751,69.049 109.386,69.049 115.824,62.611 125.105,62.611 R9.1 133.838,65.776 R4.2 C8.1
NetC8_2: C8.2 Op3.6 Op4.3 Op5.2 R9.2 | length 81.6
  Bottom Layer w0.635: Op5.2 87.63,86.868 106.165,86.868 107.309,85.723 119.382,85.723 Op4.3 120.523,78.994 120.523,75.311 122.047,73.787 125.349,73.787 ; Op3.6 118.237,66.675 125.349,73.787 ; C8.2 135.422,76.327 R9.2 125.349,73.787
NetC12_1: C12.1 D7.1 D8.1 Op7.3 R14.2 | length 58.3
  Bottom Layer w0.635: D8.1 93.614,108.402 D7.1 95.829,104.893 C12.1 93.806,102.663 96.266,100.203 100.965,100.203 Op7.3 104.013,101.727 108.966,96.774 122.691,96.774 123.96,95.506 123.96,93.972 R14.2
NetC13_1: C13.1 U.6 U.9 | length 54.8
  Top Layer w0.635: v1(73.279,96.266) 75.767,93.778 78.965,93.778 86.233,86.509 86.233,69.596 v1(87.884,67.945) ; C13.1@94.027,69.516 C13.1
  Bottom Layer w0.635: U.6 74.676,99.441 ; v1(73.279,96.266) 73.279,98.044 74.676,99.441 ; U.9 74.676,99.441 ; v1(87.884,67.945) 92.663,67.945 C13.1
NetC13_2: C13.2 R16.1 U.10 | length 97.2
  Top Layer w0.635: v1(79.883,99.568) 86.995,92.456 102.489,92.456 103.886,93.853 106.426,93.853 109.982,90.297 109.982,85.979 107.061,83.058 101.981,83.058 98.425,79.502 98.425,69.596 v1(103.505,64.516)
  Bottom Layer w0.635: U.10 v1(79.883,99.568) ; R16.1 86.995,60.833 92.583,60.833 94.234,62.484 C13.2 v1(103.505,64.516)
NetD1_2: D1.2 D4.1 P1.3 | length 13.2
  Bottom Layer w0.381: P1.3 P1.3@36.481,35.719 ; D4.1@44.776,35.719 D4.1 ; D1.2@44.808,40.467 D1.2
  Bottom Layer w0.635: P1.3@36.481,35.719 D4.1@44.776,35.719 ; D4.1 D1.2@44.808,40.467
NetD2_2: D2.2 D3.1 P1.1 | length 29.4
  Bottom Layer w0.381: D2.2 D2.2@55.245,56.411
  Bottom Layer w0.635: P1.1 38.1,39.751 44.069,45.72 50.65,45.72 D3.1 D2.2@55.245,56.411
NetD5_1: D5.1 Op5.6 | length 13.7
  Bottom Layer w0.635: Op5.6@91.186,80.38 104.89,80.38 D5.1
NetD5_2: D5.2 D6.2 U1.12 | length 42.4
  Bottom Layer w0.635: U1.12 78.359,90.297 104.371,90.297 D5.2 110.871,90.828 D6.2
NetD6_1: D6.1 Op4.6 | length 3.4
  Bottom Layer w0.635: D6.1 112.28,81.777 115.686,81.777 Op4.6
NetD7_2: D7.2 U.3 | length 24.1
  Top Layer w0.635: v1(72.009,107.061) 72.009,110.236 76.581,114.808 78.74,114.808 81.407,112.141 v1(81.407,110.617)
  Bottom Layer w0.635: U.3 v1(72.009,107.061) ; v1(81.407,110.617) D7.2
NetD8_2: D8.2 U.11 | length 9.1
  Bottom Layer w0.635: U.11 78.994,104.521 83.523,99.992 83.523,98.905 D8.2
NetLED1?_1: LED1?.1 R15.2 | length 4.8
  Bottom Layer w0.635: R15.2 141.444,101.854 141.776,102.186 LED1?.1
NetOp3_3: Op3.3 R17.2 R20.1 | length 47.2
  Bottom Layer w0.635: Op3.3 114.398,60.862 124.558,60.862 130.683,54.737 135.151,54.737 139.596,50.292 R17.2 R20.1
NetOp4_2: Op4.2 R18.2 R21.1 | length 46.4
  Bottom Layer w0.635: R21.1 118.922,88.773 119.748,89.599 131.509,89.599 134.62,86.487 134.62,80.899 R18.2 131.873,78.359 130.984,79.248 Op4.2
NetOp6_2: LDR.1@147.863,76.962 Op6.2 R11.1 | length 185.7
  Top Layer w0.635: v1(59.69,80.391) 65.532,80.391 67.945,77.978 v1(67.945,74.93) ; Op6.2 73.025,74.168 74.676,72.517 74.676,61.595 70.104,57.023 70.104,47.498 68.453,45.847 68.453,37.592 71.755,34.29 145.542,34.29 147.574,36.322 v1(147.574,53.975)
  Bottom Layer w0.635: R11.1 58.029,82.052 v1(59.69,80.391) ; v1(67.945,74.93) 68.707,74.168 Op6.2 ; v1(147.574,53.975) 147.574,59.69 145.415,61.849 145.415,74.514 LDR.1@147.863,76.962
NetOp6_6: Op6.6 U1.13 | length 18.6
  Top Layer w0.635: v1(76.164,82.641) 81.788,77.017 v1(81.788,71.628)
  Bottom Layer w0.635: U1.13 75.604,84.67 75.604,83.202 v1(76.164,82.641) ; Op6.6 v1(81.788,71.628)
NetOp7_2: Op7.2 R12.2 R13.1 | length 22.8
  Bottom Layer w0.635: Op7.2 104.267,106.045 R12.2 105.855,111.823 114.11,111.823 R13.1 ; R13.1@115.824,110.236 R13.1@116.031,110.236
NetOp7_6: Op7.6 R15.1 T3.1 T4.1 | length 111
  Top Layer w0.635: v1(68.453,123.825) 97.539,123.825 106.206,115.158 106.206,102.777 v1(106.172,102.743)
  Bottom Layer w0.635: T4.1 43.688,123.063 52.197,123.063 T3.1 60.325,123.825 v1(68.453,123.825) ; v1(106.172,102.743) 107.188,101.727 Op7.6 110.236,101.854 R15.1
NetR14_1: R14.1 VR3.2 | length 22.9
  Bottom Layer w0.635: R14.1 146.694,93.853 150.149,90.398 VR3.2
NetSW1_2: SW1.2 T1.1 T2.1 U.1 | length 37
  Top Layer w0.635: v1(64.135,103.378) v1(64.135,109.22)
  Bottom Layer w0.635: SW1.2 51.181,103.632 T2.1 T1.1 59.245,103.314 64.072,103.314 v1(64.135,103.378) ; v1(64.135,109.22) 67.056,112.141 U.1
NetT1_2: T1.2 T2.2 U.4 | length 18.8
  Bottom Layer w0.635: T2.2 T1.2 68.58,105.791 U.4
NetT3_2: T3.2 T4.2 U.12 | length 50.4
  Bottom Layer w0.635: T4.2 44.831,121.666 49.657,121.666 54.864,116.459 56.896,116.459 58.149,117.712 58.149,119.109 T3.2 58.42,119.634 61.341,122.555 66.421,122.555 72.009,116.967 72.009,112.522 U.12
NetU1_11: U1.11 U.2 U.5 | length 51
  Top Layer w0.635: v1(63.373,98.171) 59.055,98.171 55.626,94.742 55.626,91.059 58.166,88.519 v1(64.516,88.519)
  Bottom Layer w0.635: v1(63.373,98.171) 67.183,101.981 U.5 70.016,102.147 70.651,102.147 74.041,105.537 74.041,107.696 72.136,109.601 U.2 ; v1(64.516,88.519) 66.675,88.519 U1.11
NetU_8: U.8 U.13 | length 24.2
  Bottom Layer w0.635: U.8 84.836,96.901 86.106,98.171 86.106,100.965 U.13
Vl: LDR.2@45.339,92.583 Op5.3 Op6.3 R10.1 R19.2 R22.1 | length 85.1
  Bottom Layer w0.635: LDR.2@45.339,92.583 39.116,86.36 39.116,82.042 R10.1 R19.2 R22.1 58.674,71.628 Op6.3 77.776,78.03 80.131,78.03 81.758,76.402 84.113,76.402 88.709,80.999 88.709,82.288 88.003,82.995 86.296,82.995 Op5.3
pads on no net: LDR.3 Op1.1 Op1.5 Op1.8 Op3.1 Op3.5 Op3.8 Op4.1 Op4.5 Op4.8 Op5.1 Op5.5 Op5.8 Op6.1 Op6.5 Op6.8 Op7.1 Op7.5 Op7.8 U1.1 U1.2 U1.3 U1.4 U1.5 U1.6 U1.8 U1.9 U1.10 VR2.3 VR3.1

## Polygon pours and split planes (outlines as drawn)
no net on Bottom Layer "NONET_L02_P000" (solid, pour order 0): 33.147,125.476 156.972,125.476 156.972,31.115 33.147,31.115
no net on Top Layer "NONET_L01_P001" (solid, pour order 1): 33.147,125.476 33.147,31.115 156.972,31.115 156.972,125.476

## Silkscreen, mask and mechanical layers (free items; w line width, h text height)
Top Overlay:
  text "GROUP 26  - PIR sensor project" at 106.299,117.729 h1.27
  text "time" at 142.236,89.92 h1.5 r270
  text "gain" at 149.525,52.997 h1.5

## Text inside footprints (layer, text, board x,y; h text height)
C12: Top Overlay "+" at 92.837,106.767 h1.5 r270
C13: Top Overlay "+" at 93.472,73.62 h1.5 r270